# EAGLE board phone_jack_breaklight_Seeed_OPL (EAGLE 7.7.0)
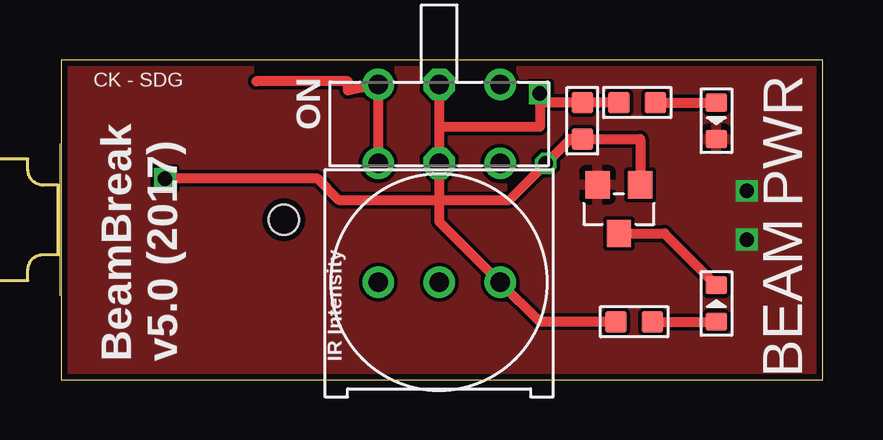
[diagram p0: board, top side]
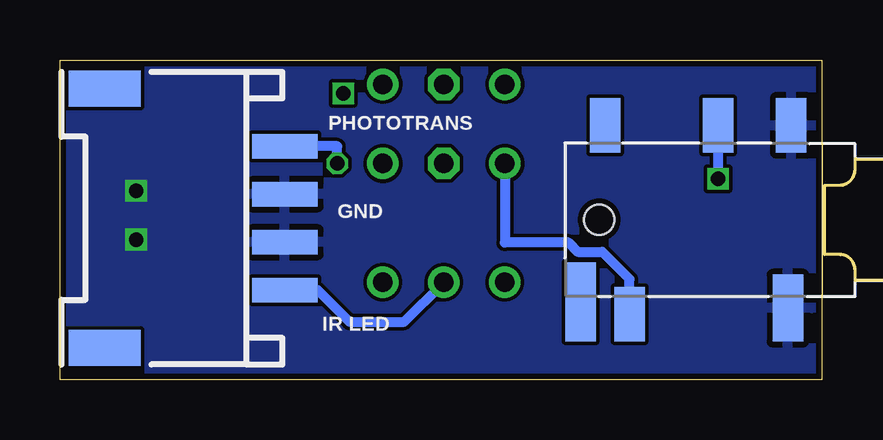
[diagram p1: board, bottom side, seen from below]

Size 31.81 x 13.34 mm. Coordinates in mm from the lower left corner, seen from the top.
Outline: 31.81,0 31.81,13.34 0.06,13.34 0.06,0 31.81,0
Copper layers (1*16): Top 0.035mm / dielectric 1.5mm / Bottom 0.035mm
Design rules "SeeedStudio_2layer_DRU_no_angle_20140221": minimum track width 6mil, minimum drill 12mil, track to track 6mil, track to pad 6mil, pad to pad 6mil, via to via 6mil, smd to smd 0mil, copper to edge 10mil, drill to drill 10mil, minimum pad ring 10mil, minimum via ring 6mil, stop-mask expansion 2mil, vias tented up to drill 100mil, thermal gap 10mil

## Footprints (pad centres in the part's own frame; a part is rotated, then mirrored left to right if it is on the bottom)
LED-0603 = smd 0.762 x 0.889: + -0.762,0; - 0.762,0
AUDIO6P-SMD-3.5-14.0X6.4X5.0MM = smd 1.27 x 2.286: COM1 -4.572,3.937; L -11.303,-3.937; R -7.62,3.937; RS -12.319,3.937 | smd 1.27 x 2.794: COM2 -4.699,-3.683 | smd 1.27 x 3.302: LS -13.335,-3.429 | hole 1.27: -12.573,0
HW4-SMD-2.0-90D = smd 1.01 x 2.74: 1 -3,-0.1; 2 -1,-0.1; 3 1,-0.1; 4 3,-0.1 | smd 1.5 x 3: SS1 -5.4,7.4; SS2 5.4,7.4
SOT-23 = smd 1.016 x 1.143: 1 -0.889,-1.016; 2 0.889,-1.016; 3 0,1.016
R0603 = smd 0.889 x 0.889: 1 0,0.762; 2 0,-0.762
ADJR3-9.5X9.5X10.5MM = drill 0.8: 1 -2.54,0; 2 0,0; 3 2.54,0
SW6-2.54-9.0X3.5X3.2MM-90D = drill 0.813 pad 1.27: CH1A -2.54,-1.65; CH1B 2.54,-1.65; CH2A -2.54,1.65; CH2B 2.54,1.65 | drill 0.813 pad 1.27 octagon: COM1 0,-1.65; COM2 0,1.65

## Placement (x,y rotation side)
BEAM  YELLOW-0603  [LED-0603]  27.37,3.17 90 top
J1  ST-PJ-312  [AUDIO6P-SMD-3.5-14.0X6.4X5.0MM]  -3.24,6.67 0 bottom
J2  4P-SMD-2.0-90D  [HW4-SMD-2.0-90D]  22.54,6.73 90 bottom
PWR  RED-0603  [LED-0603]  27.37,10.79 270 top
Q1  BSS138W-7-F  [SOT-23]  23.3,7.11 180 top
R1  2K  [R0603]  24.07,11.56 90 top
R2  2K  [R0603]  23.94,2.41 90 top
R3  22K  [R0603]  21.78,10.79 0 top
R4  10K  [ADJR3-9.5X9.5X10.5MM]  15.81,4.06 0 top
SW1  [SW6-2.54-9.0X3.5X3.2MM-90D]  15.81,10.67 180 top

## Library data of the parts
BEAM = Seeed-LED-2016; MPN: 19-217-Y5C-AM1N1VY-3T
J1 = Seeed-Connector -2016; MPN: ST-PJ-312
J2 = Seeed-Connector -2016
PWR = Seeed-LED-2016; MPN: 19-217-R6C-AL1M2VY-3T
Q1 = Seeed-Transistor-2016; MPN: BSS138W-7-F
R1 R2 = Seeed-Resistor-2016; MPN: RC0603JR-072KL
R3 = Seeed-Resistor-2016; MPN: RC0603JR-0722KL
R4 = Seeed-Resistor-2016; MPN: 3386U-103
SW1 = Seeed-Switch-2016

## Nets
GND: J1.COM1 J1.COM2 J2.2 J2.3 PWR.- Q1.2
IRLED: J2.1 R4.2
N$1: BEAM.+ R2.2
N$2: J1.L SW1.CH1B SW1.CH2B
N$3: BEAM.- Q1.3
N$4: PWR.+ R1.2
SIG: J1.R J2.4 Q1.1 R3.2
VCC: R1.1 R2.1 R3.1 R4.3 SW1.COM1 SW1.COM2

## Tracks (layer width: path | path; a pad name or v marks a point on that pad's centre or on a via)
GND  (via drill 0.6)
  other vias: 28.64,5.84 28.64,7.87
  pour Top: 0.06,0 31.81,0 31.94,13.34 0.19,13.34
  pour Bottom: 0.06,0 31.81,0 31.81,13.34 0.06,13.34
IRLED
  Bottom 0.406: J2.1 21.07,3.73 19.75,2.41 17.46,2.41 R4.2
N$1
  Top 0.406: R2.2 BEAM.+
N$2
  Top 0.406: 8.19,12.45 12,12.45 12,12.06 SW1.CH1B SW1.CH2B
  Bottom 0.406: J1.L 8.06,4.19 9.21,5.33 10.22,5.33 10.6,5.71 13.27,5.71 SW1.CH2B
N$3
  Top 0.406: Q1.3 25.21,6.1 BEAM.-
N$4
  Top 0.406: R1.2 PWR.+
SIG  (via drill 0.6)
  Top 0.406: v4.38,8.38 10.73,8.38 11.62,7.49 18.73,7.49 v20.26,9.02 21.27,10.03 R3.2 24.19,10.03 Q1.1
  Bottom 0.406: v20.26,9.02 20.26,9.73 J2.4 | J1.R v4.38,8.38
VCC  (via drill 0.6)
  Top 0.406: SW1.COM1 15.81,10.54 | 15.81,10.54 20,10.54 v20,11.94 20,11.56 R3.1 R1.1 | 15.81,10.54 SW1.COM2 15.81,6.6 R4.3 20,2.41 R2.1

## Text on the board
tPlace: BeamBreak / v5.0 (2017)
bPlace: PHOTOTRANS | GND | IR LED
tNames: CK - SDG | ON | IR Intensity